# Altium PCB Receiver.PcbDoc
Units mm, origin at the board's own origin, x right, y up, seen from the top; angles counter-clockwise.
Board outline 83 x 85.5 mm, 2 copper layers (Top Layer, Bottom Layer); 18 components, 21 nets, 105 pads, 0 vias.
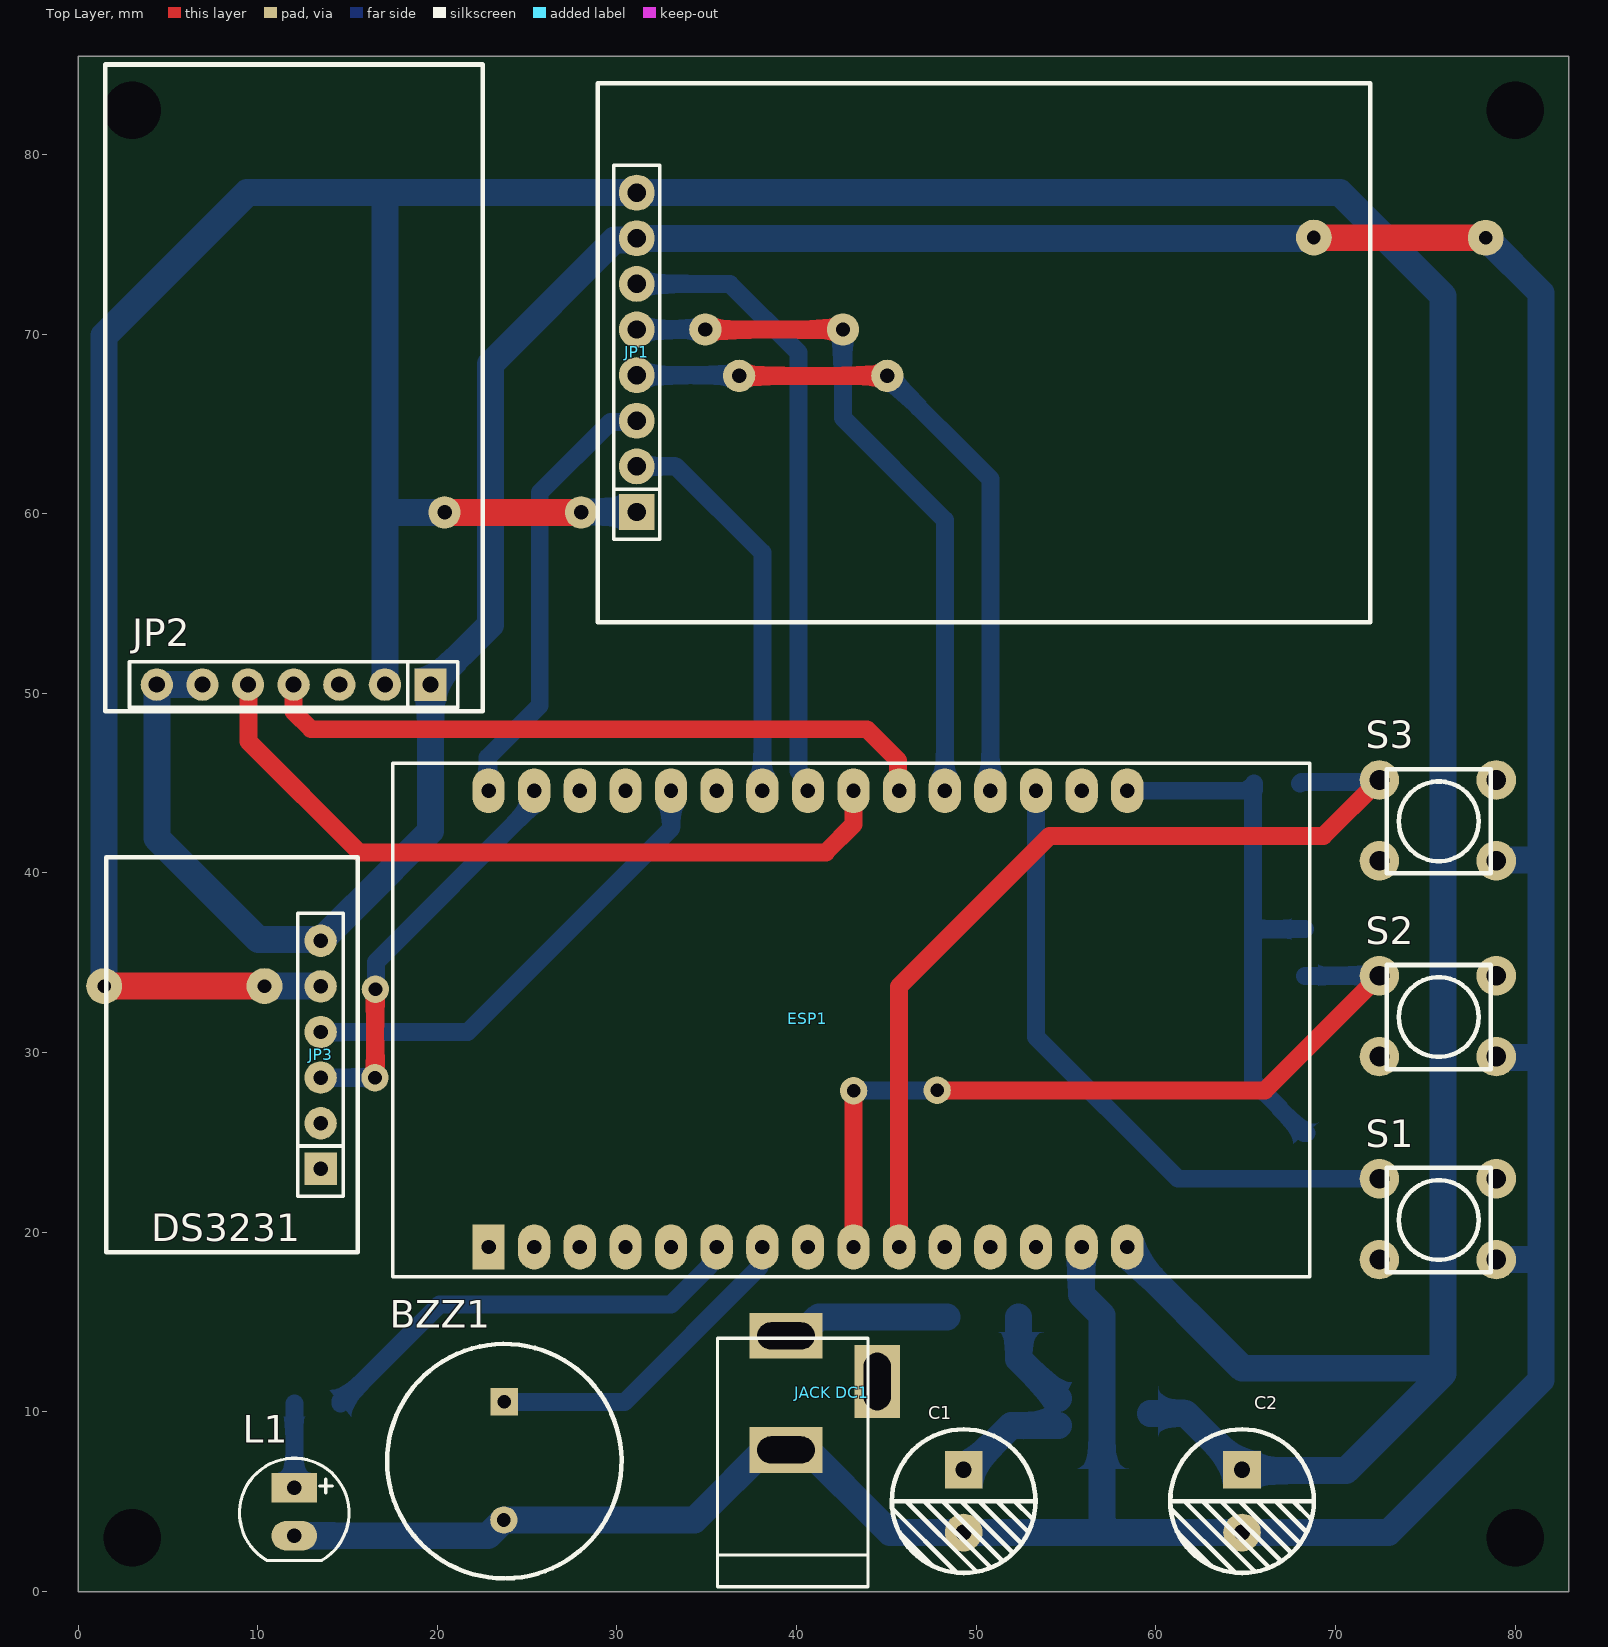
[diagram p0: Top Layer view]
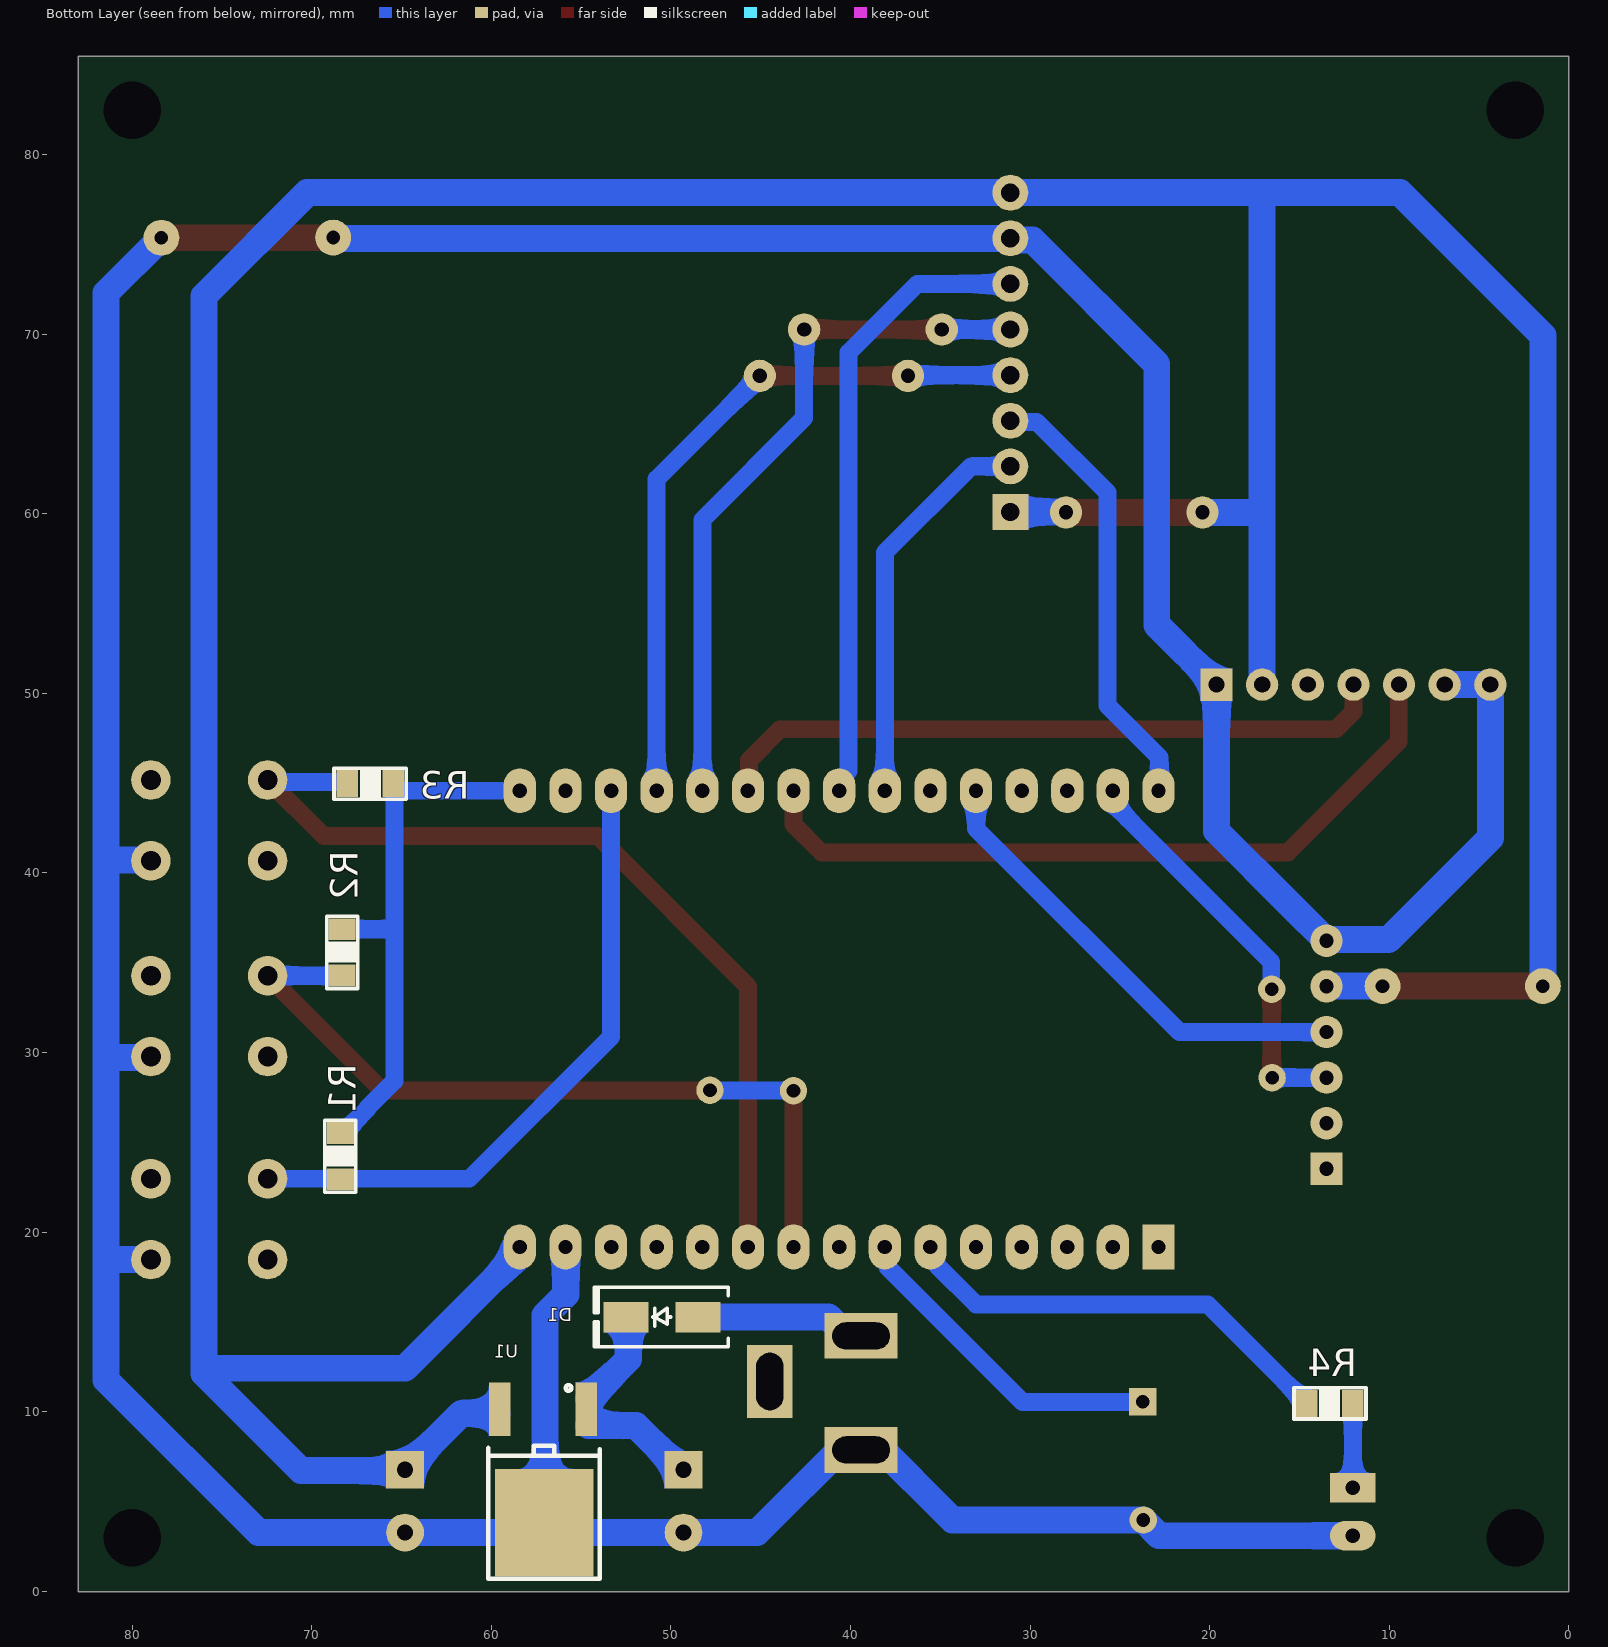
[diagram p1: Bottom Layer view, seen from below]
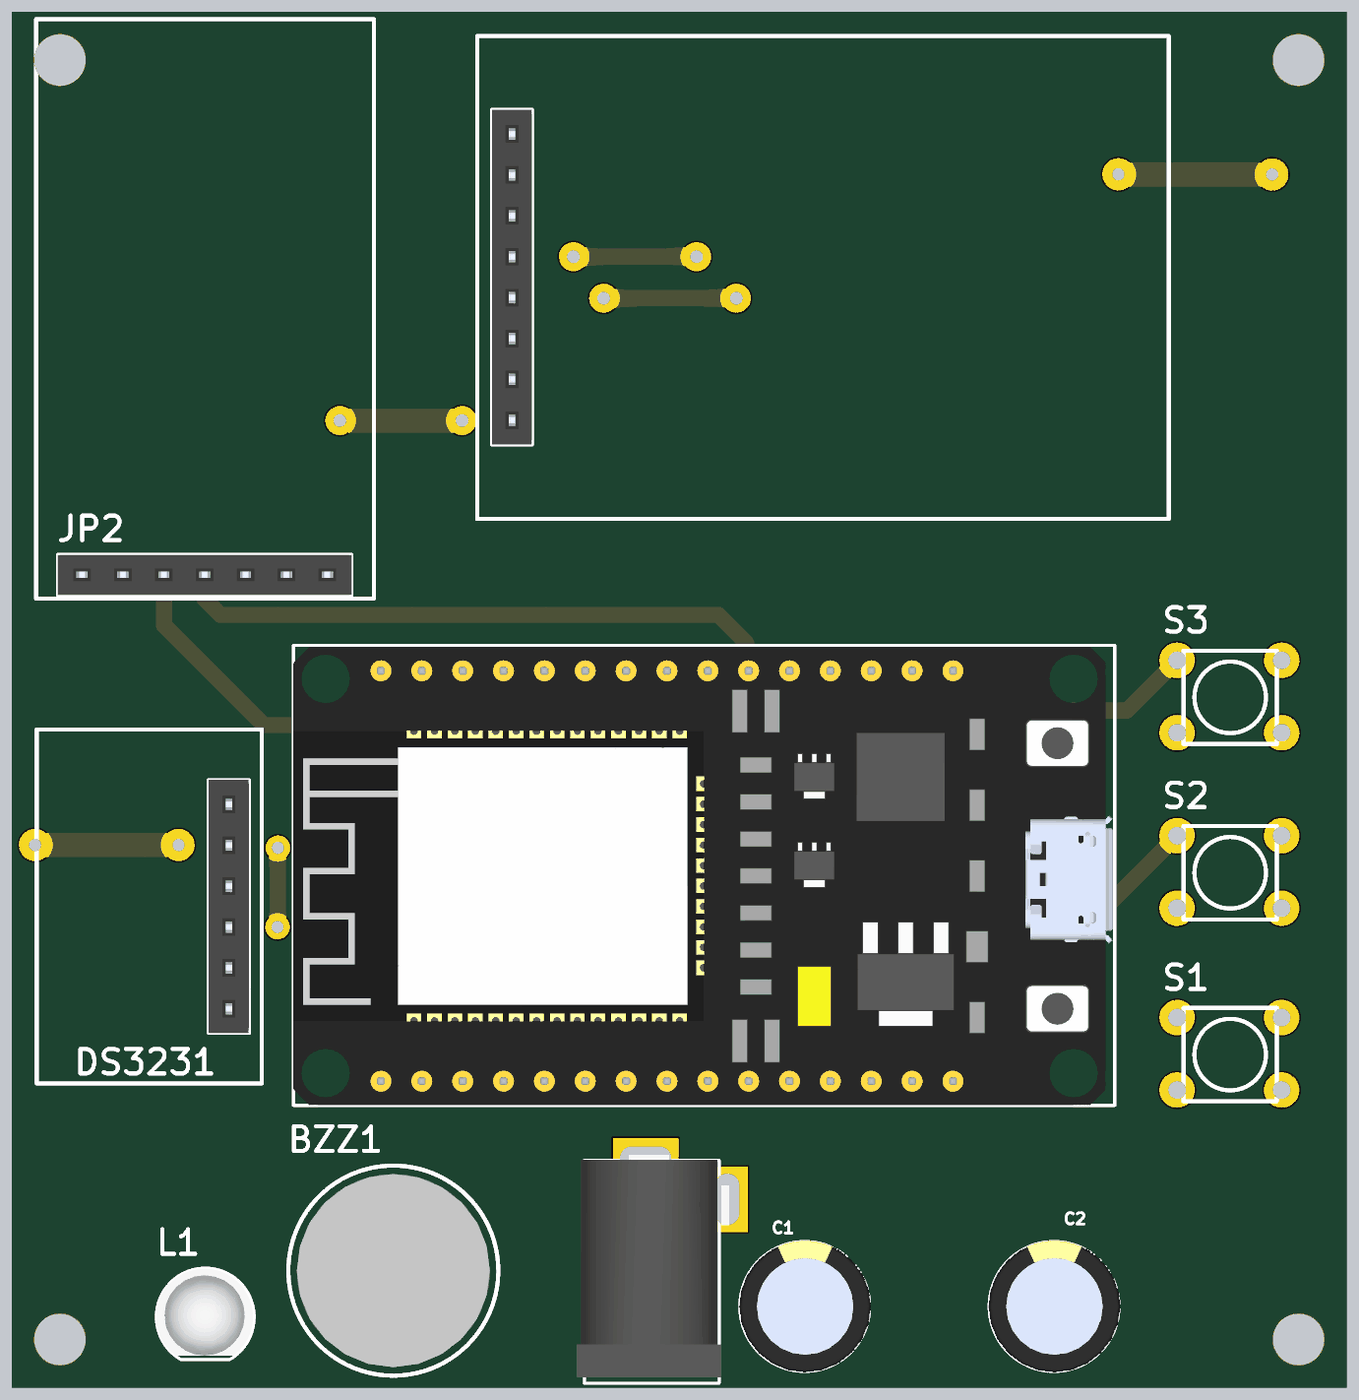
[diagram p2: 3D render of the assembled board from above, using the file's embedded part models]

## Layer stack, top to bottom
Top Solder: solder mask 0.0102, Solder Resist, Dk 3.5
Top Layer: signal copper 0.0356
Dielectric 1: dielectric 0.32, FR-4, Dk 4.8
Bottom Layer: signal copper 0.0356
Bottom Solder: solder mask 0.0102, Solder Resist, Dk 3.5

## Board outline
0,-0.025 0,85.475 83,85.475 83,-0.025

## Design rules (kind name [scope] priority, off if disabled: settings)
Clearance [All] p1: gap=0.254 ignorepadtopadclearanceinfootprint=FALSE
PolygonConnect [All] p1: connectstyle=Relief reliefconductorwidth=0.254 reliefentries=4 polygonreliefangle="90 Angle" airgapwidth=0.254
RoutingVias [All] p1: holewidth=0.711 width=1.27 viastyle="Through Hole" minholewidth=0.711 minwidth=1.27 maxholewidth=0.711 maxwidth=1.27
SolderMaskExpansion [All] p1: expansion=0.102 istentingtop=FALSE
Width [All] p1: maxlimit=1.5 minlimit=1 preferedwidth=1.5
30 further rules are at their usual default settings.

## Components (designator, comment, footprint, x,y, rotation, side; value= is the part's Value field where it differs from the comment)
BZZ1 "Buzzer" "buzzer 5V" 23.725,7.252 r270 top
C1 "220uF" "Tu hoa 8mm" 49.3,5.025 r270 top
C2 "220uF" "Tu hoa 8mm" 64.8,5.025 r270 top
D1 "M7" "DIODE SMA" 50.5,15.275 r0 bottom
ESP1 "ESP32 DEVKIT" "ESP32 WROOM 32 KIT" 22.85,19.176 r90 top
"JACK DC1" "JACK DC 5.5" "JACK DC 5.5" 41.95,11.05 r90 top value="Jac DC"
JP1 "LCD_TFT" "JP 1x8 CT" 31.1,60.095 r90 top
JP2 "LORA" "JP 1x7 CT" 19.618,50.483 r180 top
JP3 "DS3231" "JP 1x6 CT" 13.5,23.525 r90 top
L1 "LED 5mm" LED-5MM-Green 12.033,5.637 r270 top
R1 "220" 0805 68.4,24.225 r90 bottom value=O.6W
R2 "220" 0805 68.3,35.575 r90 bottom value=O.6W
R3 "220" 0805 66.75,44.975 r180 bottom value=O.6W
R4 "220" 0805 13.303,10.463 r0 bottom value=O.6W
S1 "BUTTON 4 CHAN" "BUTTON 6x6x5" 75.7,20.725 r0 top
S2 "BUTTON 4 CHAN" "BUTTON 6x6x5" 75.7,32.025 r0 top
S3 "BUTTON 4 CHAN" "BUTTON 6x6x5" 75.7,42.925 r0 top
U1 "7805" D-PAK 59.625,7.1 r0 bottom

## Footprints (in the part's own frame and the unit in brackets; to place one, negate y for a bottom-side part, rotate by r counter-clockwise, add the part's x,y. Pads: shape width x height; smd on the part's side, far side on the other; paste and mask are expansions set on the pad)
0805 [mm]
  rect 1.2x1.5 smd: 1(-1.27,0) 2(1.295,0)
  silkscreen extent -2.01,-0.86 2.01,0.86
"BUTTON 6x6x5" [mm]
  round 2.2 hole 1.1: 1(-3.25,2.25) 2(-3.25,-2.25) 3(3.25,-2.25) 4(3.25,2.25)
  silkscreen extent -2.85,-2.95 2.95,2.85
"buzzer 5V" [mil]
  rect 60x60 hole 30: 1(-130,0)
  round 60 hole 30: 2(129,-1)
  silkscreen extent -257,-257 257,257, body extent -236,-236 236,236, height 345
D-PAK [mm]
  rect 1.2x3 smd: 1(-4.913,-3.044) 3(-0.087,-3.044)
  rect 5.5x6 smd: 2(-2.575,3.275)
  silkscreen extent -5.67,-4.38 0.55,6.4
"DIODE SMA" [mm] "SMA"
  rect 2.5x1.7 smd: 1(-2,0) 2(2,0)
  silkscreen extent -3.68,-1.65 3.75,1.65, body extent -2.6,-1.37 2.6,1.37, height 2.4
"ESP32 WROOM 32 KIT" [mm]
  rect 2.5x1.8 hole 0.8: 1(0,0)
  oval 2.5x1.8 hole 0.8: 2(0,-2.54) 3(0,-5.08) 4(0,-7.62) 5(0,-10.16) 6(0,-12.7) 7(0,-15.24) 8(0,-17.78) 9(0,-20.32) 10(0,-22.86) 11(0,-25.4) 12(0,-27.94) 13(0,-30.48) 14(0,-33.02) 15(0,-35.56) 16(25.4,-35.56) 17(25.4,-33.02) 18(25.4,-30.48) 19(25.4,-27.94) 20(25.4,-25.4) 21(25.4,-22.86) 22(25.4,-20.32) 23(25.4,-17.78) 24(25.4,-15.24) 25(25.4,-12.7) 26(25.4,-10.16) 27(25.4,-7.62) 28(25.4,-5.08) 29(25.4,-2.54) 30(25.4,0)
  silkscreen extent -1.65,-45.72 26.92,5.33, body extent -1.65,-45.6 26.85,5.33, height 10.49
"JACK DC 5.5" [mm] "Jac DC input"
  rect 2.54x4.064 hole 1.5 slot 3.2 at 90 deg: 1(3.175,2.54) 2(-3.175,2.54)
  rect 4.064x2.54 hole 1.5 slot 3.2 at 0 deg: 3(0.635,-2.54)
  silkscreen extent -10.79,-2.03 3.05,6.35, body extent -10.42,-2.67 3.4,6.84, height 11.02
"JP 1x6 CT" [mm] "6 row, straight, gold plating"
  rect 1.8x1.8 hole 0.8: 1(0,0)
  round 1.8 hole 0.8: 2(2.54,0) 3(5.08,0) 4(7.62,0) 5(10.16,0) 6(12.7,0)
  silkscreen extent -1.52,-1.27 14.22,1.27, body extent -1.52,-1.25 14.22,1.25, height 8.51
"JP 1x7 CT" [mm] "7 row, straight, gold plating"
  rect 1.8x1.8 hole 0.9: 1(0,0)
  round 1.8 hole 0.9: 2(2.54,0) 3(5.08,0) 4(7.62,0) 5(10.16,0) 6(12.7,0) 7(15.24,0)
  silkscreen extent -1.52,-1.27 16.76,1.27, body extent -1.52,-1.25 16.76,1.25, height 8.51
"JP 1x8 CT" [mm] "8 row, straight, gold plating"
  rect 2x2 hole 1.02: 1(0,0)
  round 2 hole 1.02: 2(2.54,0) 3(5.08,0) 4(7.62,0) 5(10.16,0) 6(12.7,0) 7(15.24,0) 8(17.78,0)
  silkscreen extent -1.52,-1.27 19.3,1.27, body extent -1.52,-1.25 19.3,1.25, height 8.51
LED-5MM-Green [mil] "LED 2 PIN, 5 ly , Only colour,pin to pin 100mil"
  rect 65x100 hole 32: 1(-5,0)
  oval 65x100 hole 32: 2(100,0)
  silkscreen extent -70,-120 154,120, body extent -69,-120 145,117, height 339
"Tu hoa 8mm" [mm]
  rect 2.1x2.1 hole 0.9: 1(-1.75,0)
  round 2.1 hole 0.9: 2(1.75,0)
  silkscreen extent -4,-4 4,4, body extent -4.1,-4.07 4.1,4.13, height 13.81

## Part data
C1 C2: library part "Tu Hoa 220uF 25V 8x10", "Cắm", Chung_Loai=Cắm, Don_Vi=Con, Ma_Hang=MH006864, So_Chan=2, Ten_Linh_Kien="Tụ Hóa 220uF 25V 8x10MM"
D1: library part "Diode M7 ( 4007 )", "Dán", Chung_Loai=Dán, Don_Vi=Con, Ma_Hang=MH000944, Ten_Linh_Kien="Diode M7 1N4007 SMD 1A 1000V"
ESP1: library part "ESP32 WROOM 32 KIT"
JP1: library part "JP 1x8 2.54 Cai Thang", "Cắm", Chung_Loai=Cắm, Don_Vi=Con, Ma_Hang=MH004006, Ten_Linh_Kien="Jump Đơn Cái 2.54MM 1x20P Thẳng"
JP2: library part "JP 1x7 2.54 Cai Thang", "Cắm", Chung_Loai=Cắm, Don_Vi=Con, Ma_Hang=MH004006, Ten_Linh_Kien="Jump Đơn Cái 2.54MM 1x20P Thẳng"
JP3: library part "JP 1x6 2.54 Cai Thang", "Cắm", Chung_Loai=Cắm, Don_Vi=Con, Ma_Hang=MH004006, Ten_Linh_Kien="Jump Đơn Cái 2.54MM 1x20P Thẳng"
L1: library part "LED 5mm Xanh La", "Cắm", Chung_Loai=Cắm, Don_Vi=Con, Ma_Hang=MH008969, Ten_Linh_Kien="LED 5MM Phủ Xanh (1000c)"
R1 R2 R3 R4: library part "DIENTRO 0.6W"

## Free pads (board coordinates)
  round 2 hole 0.762: 17(1.45,33.7) 18(10.375,33.7) 43(78.366,75.365) 44(68.8,75.375)
  round 0 hole 3.2: 35(3,2.975) 35(3,82.475) 35(80,2.975) 35(80,82.475)
  round 1.8 hole 0.8: 36(34.92,70.255) 37(36.8,67.675) 38(45.05,67.675) 39(42.58,70.255) 41(28,60.075) 42(20.4,60.075)
  round 1.524 hole 0.762: 45(16.55,33.525) 46(16.525,28.6) 49(47.825,27.9) 50(43.175,27.875)

## Nets (pads, with @x,y where several pads share a name; then routed paths per layer and width w, separated by ;. In a path a pad name is that pad's centre, name@x,y a point inside that pad or via, vN(x,y) a via of type N, cw(c..) or ccw(c..) an arc to the next point about the centre after c; other vN are vias at no path point)
+3V3: ESP1.16 R1.2 R2.2 R3.2 | length 30.7
  Bottom Layer w1: ESP1.16@58.434,44.601 ESP1.16 65.056,44.576 65.205,44.725 65.355,44.725 65.455,44.825 R3.2 ; R3.2@65.455,44.625 65.4,44.57 65.4,36.875 ; R2.2 68.298,36.873 65.402,36.873 65.4,36.875 ; R1.2 68.25,25.52 66.9,26.87 66.9,26.925 65.4,28.425 65.4,36.875
+5V: C2.1 ESP1.15 JP1.1 JP1.8 JP2.2 JP3.5 pad.17 pad.18 pad.41 pad.42 U1.3 | length 270
  Top Layer w1.5: pad.17 pad.18 ; pad.42 pad.41
  Bottom Layer w1.5: pad.17 1.45,69.913 9.412,77.875 17.078,77.875 JP1.8 70.25,77.875 76,72.125 76,12.425 ; pad.18 13.48,33.7 13.495,33.685 JP3.5 ; JP2.2 17.078,60.125 ; 17.078,77.867 17.078,60.125 ; pad.42 17.128,60.075 17.078,60.125 ; pad.41@28.17,60.095 JP1.1 JP1.1@31.288,60.283 ; ESP1.15@58.508,18.728 64.811,12.425 76,12.425 ; U1.3@59.688,9.916 61.659,9.916 C2.1 64.85,6.725 70.6,6.725 76,12.125 76,12.425
+12V: "JACK DC1.1" D1.1 | length 9.4
  Bottom Layer w1.5: 39.41,14.225 40.172,14.225 41.236,15.289 D1.1@48.363,15.289
A0: ESP1.19 JP1.4 pad.37 pad.38 | length 39.6
  Top Layer w1: pad.37 pad.38
  Bottom Layer w1: JP1.4 pad.37@37.01,67.715 ; pad.38 50.79,61.935 ESP1.19
AUX: JP2.3
CS: ESP1.23 JP1.6 | length 35.2
  Bottom Layer w1: JP1.6 36.28,72.795 40.1,68.975 40.1,45.672 40.63,45.142 ESP1.23
Enter: ESP1.10 R3.1 S3.1 | length 50.5
  Top Layer w1: ESP1.10 45.71,33.685 54.075,42.05 69.325,42.05 S3.1
  Bottom Layer w1: R3.1 68.12,45.075 72.35,45.075 S3.1
Giam: ESP1.9 pad.49 pad.50 R2.1 S2.1 | length 44.8
  Top Layer w1: ESP1.9 43.172,19.179 43.172,27.872 pad.50 ; pad.49 66.075,27.9 S2.1
  Bottom Layer w1: pad.50@43.15,27.85 pad.50 43.2,27.9 pad.49 ; R2.1@68.3,34.275 S2.1
GND: "JACK DC1.2" BZZ1.2 C1.2 C2.2 ESP1.14 JP1.7 JP2.1 JP2.6 JP2.7 JP3.6 L1.2 pad.43 pad.44 S1.3 S2.3 S3.3 U1.2 | length 282.5
  Top Layer w1.5: pad.44 pad.43
  Bottom Layer w1.5: JP2.6 JP2.7 4.378,41.947 10.043,36.282 13.443,36.282 JP3.6 13.505,36.225 15.485,38.204 15.49,38.204 19.618,42.332 JP2.1 22.95,53.815 22.95,68.325 29.864,75.239 31.004,75.239 JP1.7 pad.44@68.8,75.335 ; L1.2 22.816,3.097 23.694,3.975 BZZ1.2 34.323,3.975 38.648,8.3 40.172,8.3 45.197,3.275 C1.2 C2.2 72.95,3.275 81.45,11.775 81.45,40.8 ; ESP1.14 55.85,19.156 55.85,16.525 57,15.375 57,3.875 U1.2 ; pad.43 81.45,72.281 81.45,40.8 ; S1.3 79.088,18.475 79.089,18.476 81.256,18.476 81.306,18.426 ; S2.3 79.006,29.719 81.263,29.719 81.306,29.676 ; S3.3@79.257,40.618 79.007,40.618 S3.3 79.007,40.732 81.382,40.732 81.45,40.8
I2C_SCL: ESP1.29 JP3.3 pad.45 pad.46 | length 22.7
  Top Layer w1: pad.46 16.538,28.612 16.538,33.512 pad.45
  Bottom Layer w1: JP3.3 16.398,28.603 pad.46 ; pad.45 16.574,33.549 16.574,35.049 25.237,43.712 25.237,44.423 ESP1.29
I2C_SDA: ESP1.26 JP3.4 | length 26.3
  Bottom Layer w1: JP3.4 21.692,31.145 33.01,42.463 ESP1.26
L1: ESP1.6 R4.2 | length 25
  Bottom Layer w1: R4.2 14.598,10.613 14.698,10.713 14.848,10.713 20.11,15.975 33,15.975 35.15,18.125 35.15,18.21 35.55,18.61 ESP1.6
LS1: BZZ1.1 ESP1.7 | length 18.5
  Bottom Layer w1: BZZ1.1 30.429,10.554 37.937,18.062 37.937,19.023 ESP1.7
MOSI: ESP1.30 JP1.3 | length 24.9
  Bottom Layer w1: ESP1.30 22.8,44.626 22.8,46.425 25.7,49.325 25.7,61.175 29.632,65.107 31.032,65.107 JP1.3
NetC1_1: C1.1 D1.2 U1.1 | length 11.8
  Bottom Layer w1.5: C1.1@49.315,6.597 51.951,9.233 U1.1@54.576,9.233 ; D1.2@52.363,15.289 52.363,12.946 54.426,10.883 U1.1@54.576,10.733
NetL1_1: L1.1 R4.1 | length 4.7
  Bottom Layer w1: L1.1 R4.1
RST: ESP1.20 JP1.5 pad.36 pad.39 | length 39.5
  Top Layer w1: pad.36 pad.39
  Bottom Layer w1: JP1.5 pad.36 ; pad.39 42.58,65.325 48.25,59.655 ESP1.20
RXD: ESP1.22 JP2.5 | length 41.9
  Top Layer w1: JP2.5 9.475,50.466 9.475,47.325 15.65,41.15 41.625,41.15 43.17,42.695 ESP1.22
SCK: ESP1.24 JP1.2 | length 22.2
  Bottom Layer w1: JP1.2 33.29,62.635 38.09,57.835 ESP1.24
Tang: ESP1.18 R1.1 S1.1 | length 36.1
  Bottom Layer w1: ESP1.18 53.33,30.87 61.225,22.975 S1.1
TXD: ESP1.21 JP2.4 | length 38
  Top Layer w1: JP2.4 11.998,48.977 12.975,48 43.92,48 45.655,46.265 45.655,44.631 ESP1.21
pads on no net: "JACK DC1.3" ESP1.1 ESP1.2 ESP1.3 ESP1.4 ESP1.5 ESP1.8 ESP1.11 ESP1.12 ESP1.13 ESP1.17 ESP1.25 ESP1.27 ESP1.28 JP3.1 JP3.2 S1.2 S1.4 S2.2 S2.4 S3.2 S3.4

## Silkscreen, mask and mechanical layers (free items; w line width, h text height)
Top Overlay:
  lines w0.254: 1.518,49.012 22.518,49.012 22.518,85.012 1.518,85.012 1.518,49.012 ; 1.555,18.885 15.555,18.885 15.555,40.885 1.555,40.885 1.555,18.885 ; 28.934,53.963 71.934,53.963 71.934,83.963 28.934,83.963 28.934,53.963